# Altium PCB pcb.PcbDoc (part 3 of 6)
Units mm, origin at the board's own origin, x right, y up, seen from the top; angles counter-clockwise.
Board outline 85.44 x 182.72 mm, 2 copper layers (Top Layer, Bottom Layer); 68 components, 54 nets, 232 pads, 184 vias.
Unrouted connection lines stored in the file: 53.
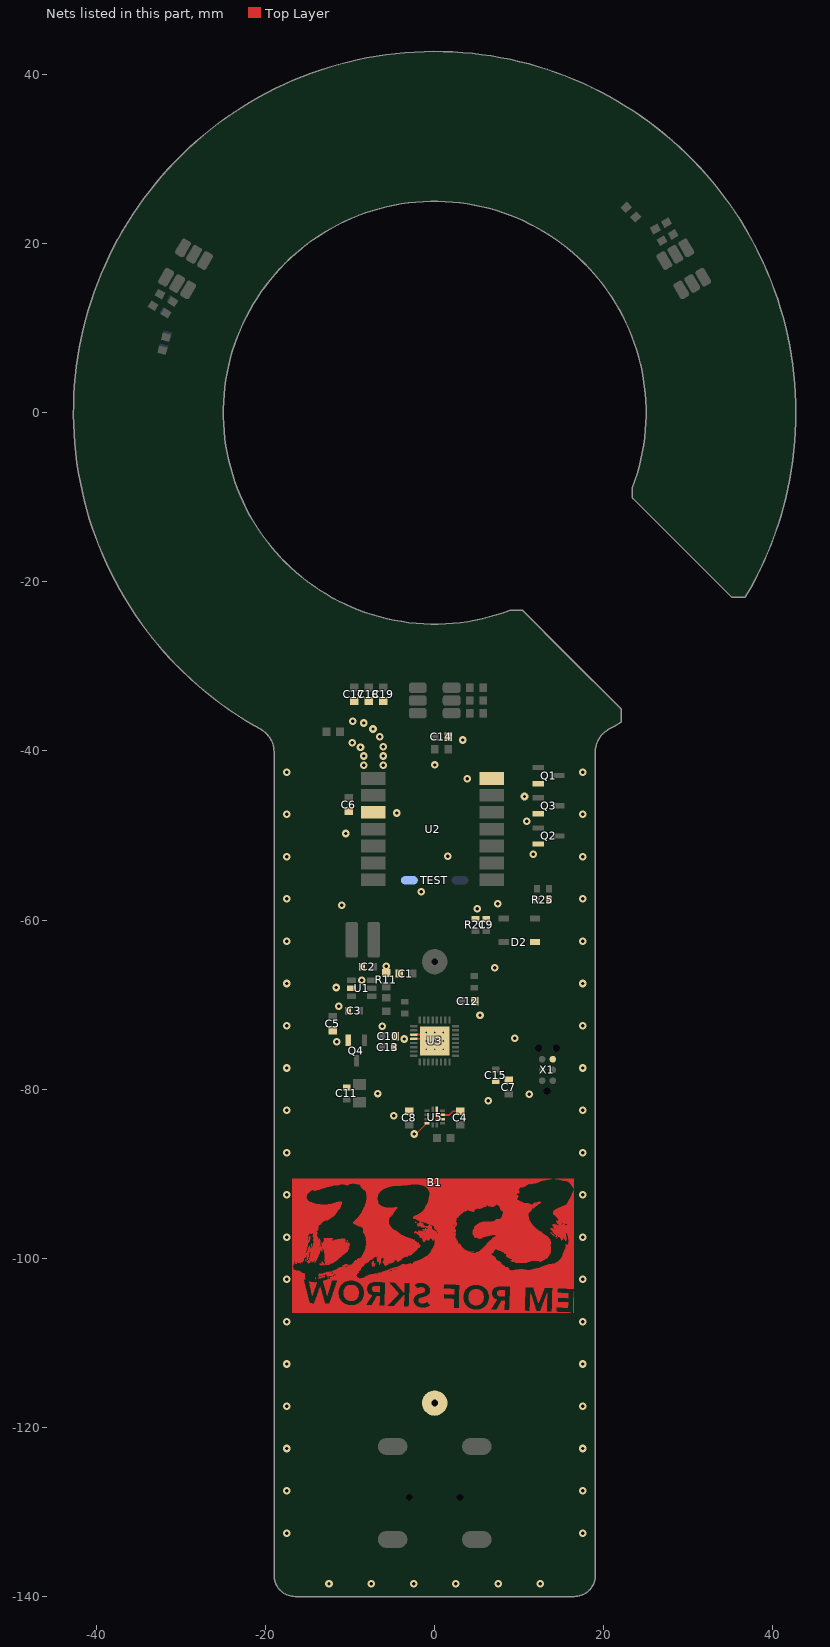
[diagram p3: the nets of this part, all layers, seen from the top]

## Via types
v1: diameter 0.9, hole 0.4, Top Layer to Bottom Layer, 143 vias
v2: diameter 1.27, hole 0.7, Top Layer to Bottom Layer, 32 vias
v3: diameter 0.5, hole 0.2, Top Layer to Bottom Layer, 9 vias

## Nets (pads, with @x,y where several pads share a name; then routed paths per layer and width w, separated by ;. In a path a pad name is that pad's centre, name@x,y a point inside that pad or via, vN(x,y) a via of type N, cw(c..) or ccw(c..) an arc to the next point about the centre after c; other vN are vias at no path point) (continued)
GND: (continued)
  Top Layer w0.025: -13.025,-99.406 -10.663,-99.406 ; -13.025,-99.381 -10.612,-99.381 ; -13.025,-97.781 -12.162,-97.781 ; -13.025,-97.755 -12.162,-97.755 ; -13.025,-97.73 -12.238,-97.73 ; -13.025,-97.704 -12.213,-97.704 ; -13.025,-97.603 -12.924,-97.603 ; -13,-103.369 -12.416,-103.369 ; -13,-103.343 -12.416,-103.343 ; -13,-103.318 -12.39,-103.318 ; -13,-103.292 -12.39,-103.292 ; -13,-101.692 -12.898,-101.692 ; -13,-100.295 -11.755,-100.295 ; -13,-100.27 -11.73,-100.27 ; -13,-100.244 -11.679,-100.244 ; -13,-100.219 -11.654,-100.219 ; -13,-100.194 -11.603,-100.194 ; -13,-100.168 -11.552,-100.168 ; -13,-100.143 -11.527,-100.143 ; -13,-100.117 -11.501,-100.117 ; -13,-100.092 -11.476,-100.092 ; -13,-100.067 -11.476,-100.067 ; -13,-100.041 -11.451,-100.041 ; -13,-100.016 -11.425,-100.016 ; -13,-99.99 -11.4,-99.99 ; -13,-99.965 -11.374,-99.965 ; -12.975,-103.445 -12.441,-103.445 ; -12.975,-103.419 -12.416,-103.419 ; -12.975,-103.394 -12.416,-103.394 ; -12.975,-102.607 -12.187,-102.607 ; -12.975,-100.371 -11.882,-100.371 ; -12.975,-100.346 -11.832,-100.346 ; -12.975,-100.321 -11.806,-100.321 ; -12.949,-103.546 -12.467,-103.546 ; -12.949,-103.521 -12.467,-103.521 ; -12.949,-103.496 -12.441,-103.496 ; -12.949,-103.47 -12.441,-103.47 ; -12.949,-100.625 -12.898,-100.625 ; -12.949,-100.6 -12.822,-100.6 ; -12.949,-100.575 -12.771,-100.575 ; -12.949,-100.448 -12.517,-100.448 ; -12.949,-100.422 -12.467,-100.422 ; -12.949,-100.397 -12.39,-100.397 ; -12.924,-103.623 -12.492,-103.623 ; -12.924,-103.597 -12.467,-103.597 ; -12.924,-103.572 -12.467,-103.572 ; -12.924,-100.549 -12.721,-100.549 ; -12.924,-100.473 -12.568,-100.473 ; -12.898,-103.724 -12.517,-103.724 ; -12.898,-103.699 -12.517,-103.699 ; -12.898,-103.673 -12.492,-103.673 ; -12.898,-103.648 -12.492,-103.648 ; -12.898,-100.524 -12.644,-100.524 ; -12.898,-100.498 -12.594,-100.498 ; -12.873,-103.8 -12.543,-103.8 ; -12.873,-103.775 -12.517,-103.775 ; -12.873,-103.75 -12.517,-103.75 ; -12.873,-100.727 -12.822,-100.727 ; -12.873,-100.702 -12.543,-100.702 ; -12.873,-93.64 -11.095,-93.64 ; -12.848,-103.902 -12.568,-103.902 ; -12.848,-103.877 -12.568,-103.877 ; -12.848,-103.851 -12.543,-103.851 ; -12.848,-103.826 -12.543,-103.826 ; -12.848,-102.581 -12.187,-102.581 ; -12.848,-101.87 -11.959,-101.87 ; -12.848,-101.692 -12.213,-101.692 ; -12.822,-103.978 -12.594,-103.978 ; -12.822,-103.953 -12.568,-103.953 ; -12.822,-103.927 -12.568,-103.927 ; -12.822,-101.845 -11.959,-101.845 ; -12.822,-100.676 -12.492,-100.676 ; -12.797,-104.08 -12.619,-104.08 ; -12.797,-104.054 -12.619,-104.054 ; -12.797,-104.029 -12.594,-104.029 ; -12.797,-104.004 -12.594,-104.004 ; -12.797,-101.667 -12.213,-101.667 ; -12.771,-104.156 -12.644,-104.156 ; -12.771,-104.131 -12.619,-104.131 ; -12.771,-104.105 -12.619,-104.105 ; -12.771,-102.556 -12.162,-102.556 ; -12.771,-101.895 -11.959,-101.895 ; -12.771,-101.641 -12.67,-101.641 ; -12.746,-104.258 -12.67,-104.258 ; -12.746,-104.232 -12.67,-104.232 ; -12.746,-104.207 -12.644,-104.207 ; -12.746,-104.181 -12.644,-104.181 ; -12.746,-101.921 -11.984,-101.921 ; -12.746,-101.819 -12.365,-101.819 ; -12.746,-101.794 -12.34,-101.794 ; -12.746,-101.768 -12.263,-101.768 ; -12.746,-101.616 -12.721,-101.616 ; -12.721,-104.334 -12.695,-104.334 ; -12.721,-104.308 -12.67,-104.308 ; -12.721,-104.283 -12.67,-104.283 ; -12.721,-102.53 16.464,-102.53 ; -12.721,-102.073 -12.695,-102.073 ; -12.721,-102.048 -12.67,-102.048 ; -12.721,-100.727 -12.594,-100.727 ; -12.67,-102.327 -12.594,-102.327 ; -12.67,-100.651 -12.441,-100.651 ; -12.644,-101.946 -12.009,-101.946 ; -12.644,-101.641 -12.213,-101.641 ; -12.619,-102.505 16.464,-102.505 ; -12.619,-102.302 -12.467,-102.302 ; -12.619,-102.048 -12.492,-102.048 ; -12.619,-102.022 -12.441,-102.022 ; -12.619,-101.997 -12.06,-101.997 ; -12.619,-101.972 -12.035,-101.972 ; -12.594,-93.615 -11.07,-93.615 ; -12.568,-100.625 -12.39,-100.625 ; -12.568,-97.628 -12.06,-97.628 ; -12.543,-102.48 16.464,-102.48 ; -12.543,-100.6 -12.365,-100.6 ; -12.517,-101.616 -8.987,-101.616 ; -12.492,-100.575 -12.365,-100.575 ; -12.467,-100.549 -12.162,-100.549 ; -12.441,-105.375 -10.663,-105.375 ; -12.441,-102.454 16.464,-102.454 ; -12.416,-105.35 -10.714,-105.35 ; -12.416,-105.324 -10.739,-105.324 ; -12.416,-105.299 -10.79,-105.299 ; -12.416,-101.591 -9.012,-101.591 ; -12.416,-100.524 -12.111,-100.524 ; -12.39,-105.274 -10.816,-105.274 ; -12.39,-105.248 -10.866,-105.248 ; -12.39,-105.223 -10.892,-105.223 ; -12.365,-105.197 -10.917,-105.197 ; -12.365,-105.172 -10.943,-105.172 ; -12.365,-105.147 -10.993,-105.147 ; -12.365,-102.429 16.464,-102.429 ; -12.365,-102.276 -12.187,-102.276 ; -12.365,-102.251 -12.187,-102.251 ; -12.365,-100.498 -12.086,-100.498 ; -12.365,-100.397 -11.933,-100.397 ; -12.34,-105.121 -11.019,-105.121 ; -12.34,-105.096 -11.044,-105.096 ; -12.34,-105.07 -11.044,-105.07 ; -12.34,-102.302 -12.238,-102.302 ; -12.34,-102.226 -12.162,-102.226 ; -12.34,-100.473 -12.035,-100.473 ; -12.34,-100.422 -11.959,-100.422 ; -12.34,-93.59 -11.07,-93.59 ; -12.314,-105.045 -11.07,-105.045 ; -12.314,-105.02 -11.095,-105.02 ; -12.314,-104.994 -11.12,-104.994 ; -12.314,-100.448 -12.009,-100.448 ; -12.289,-104.969 -11.146,-104.969 ; -12.289,-104.943 -11.146,-104.943 ; -12.289,-104.918 -11.171,-104.918 ; -12.289,-102.403 16.464,-102.403 ; -12.289,-102.2 -12.162,-102.2 ; -12.289,-102.022 -12.111,-102.022 ; -12.263,-104.893 -11.197,-104.893 ; -12.263,-104.867 -11.197,-104.867 ; -12.263,-104.842 -11.222,-104.842 ; -12.263,-100.575 -12.238,-100.575 ; -12.238,-104.816 -11.222,-104.816 ; -12.238,-104.791 -11.247,-104.791 ; -12.238,-102.378 -8.911,-102.378 ; -12.213,-104.766 -11.273,-104.766 ; -12.213,-104.74 -11.273,-104.74 ; -12.213,-104.715 -11.273,-104.715 ; -12.213,-102.175 -11.984,-102.175 ; -12.213,-101.565 -9.012,-101.565 ; -12.187,-104.689 -11.298,-104.689 ; -12.187,-104.664 -11.298,-104.664 ; -12.187,-104.639 -11.324,-104.639 ; -12.187,-93.564 -11.044,-93.564 ; -12.162,-104.613 -11.324,-104.613 ; -12.162,-104.588 -11.324,-104.588 ; -12.162,-104.562 -11.349,-104.562 ; -12.162,-102.353 -8.987,-102.353 ; -12.136,-104.537 -11.349,-104.537 ; -12.136,-104.512 -11.349,-104.512 ; -12.136,-104.486 -11.374,-104.486 ; -12.136,-102.2 -11.959,-102.2 ; -12.136,-102.149 -11.984,-102.149 ; -12.136,-101.54 -9.038,-101.54 ; -12.111,-104.461 -11.374,-104.461 ; -12.111,-104.435 -11.374,-104.435 ; -12.111,-104.41 -11.374,-104.41 ; -12.111,-102.327 -9.012,-102.327 ; -12.111,-102.226 -11.933,-102.226 ; -12.111,-102.124 -12.009,-102.124 ; -12.111,-101.514 -9.038,-101.514 ; -12.086,-104.385 -11.374,-104.385 ; -12.086,-104.359 -11.4,-104.359 ; -12.086,-104.334 -11.4,-104.334 ; -12.086,-93.539 -11.019,-93.539 ; -12.06,-104.308 -11.4,-104.308 ; -12.06,-104.283 -11.4,-104.283 ; -12.06,-104.258 -11.4,-104.258 ; -12.06,-102.251 -9.139,-102.251 ; -12.06,-102.099 -12.035,-102.099 ; -12.06,-101.819 -11.984,-101.819 ; -12.035,-104.232 -11.4,-104.232 ; -12.035,-104.207 -11.4,-104.207 ; -12.035,-104.181 -11.4,-104.181 ; -12.035,-102.556 16.464,-102.556 ; -12.035,-102.302 -9.063,-102.302 ; -12.035,-102.276 -9.114,-102.276 ; -12.035,-101.794 -11.984,-101.794 ; -12.035,-101.768 -12.009,-101.768 ; -12.035,-101.489 -9.038,-101.489 ; -12.035,-97.908 -10.562,-97.908 ; -12.009,-104.156 -11.4,-104.156 ; -12.009,-104.131 -11.4,-104.131 ; -12.009,-104.105 -11.4,-104.105 ; -12.009,-101.641 -8.987,-101.641 ; -12.009,-93.513 -11.019,-93.513 ; -11.984,-104.08 -11.4,-104.08 ; -11.984,-104.054 -11.4,-104.054 ; -11.984,-104.029 -11.4,-104.029 ; -11.984,-101.667 -9.063,-101.667 ; -11.959,-104.004 -11.4,-104.004 ; -11.959,-103.978 -11.4,-103.978 ; -11.959,-103.953 -11.4,-103.953 ; -11.959,-101.743 -9.139,-101.743 ; -11.959,-101.718 -9.139,-101.718 ; -11.959,-101.692 -9.114,-101.692 ; -11.959,-97.882 -10.562,-97.882 ; -11.933,-103.927 -11.4,-103.927 ; -11.933,-103.902 -11.4,-103.902 ; -11.933,-103.877 -11.4,-103.877 ; -11.933,-101.845 -11.857,-101.845 ; -11.933,-101.819 -11.832,-101.819 ; -11.933,-101.794 -9.165,-101.794 ; -11.933,-101.768 -9.165,-101.768 ; -11.933,-101.464 -9.063,-101.464 ; -11.933,-93.488 -10.993,-93.488 ; -11.908,-103.851 -11.4,-103.851 ; -11.908,-103.826 -11.4,-103.826 ; -11.908,-103.8 -11.4,-103.8 ; -11.882,-103.775 -11.4,-103.775 ; -11.882,-103.75 -11.374,-103.75 ; -11.882,-103.724 -11.374,-103.724 ; -11.882,-102.226 -9.165,-102.226 ; -11.882,-102.2 -9.19,-102.2 ; -11.882,-102.175 -9.215,-102.175 ; -11.882,-102.149 -9.241,-102.149 ; -11.882,-102.124 -9.241,-102.124 ; -11.882,-102.099 -9.266,-102.099 ; -11.882,-97.857 -10.562,-97.857 ; -11.857,-103.699 -11.374,-103.699 ; -11.857,-103.673 -11.374,-103.673 ; -11.857,-103.648 -11.374,-103.648 ; -11.857,-102.073 -9.266,-102.073 ; -11.857,-101.438 -9.063,-101.438 ; -11.857,-93.463 -10.993,-93.463 ; -11.832,-103.623 -11.349,-103.623 ; -11.832,-103.597 -11.349,-103.597 ; -11.832,-103.572 -11.349,-103.572 ; -11.832,-102.048 -9.266,-102.048 ; -11.806,-103.546 -11.324,-103.546 ; -11.806,-103.521 -11.324,-103.521 ; -11.806,-103.496 -11.324,-103.496 ; -11.806,-102.022 -9.266,-102.022 ; -11.806,-101.413 -9.063,-101.413 ; -11.806,-97.831 -10.562,-97.831 ; -11.806,-93.437 -10.968,-93.437 ; -11.781,-103.47 -11.298,-103.47 ; -11.781,-103.445 -11.298,-103.445 ; -11.781,-103.419 -11.298,-103.419 ; -11.755,-103.394 -11.273,-103.394 ; -11.755,-103.369 -11.273,-103.369 ; -11.755,-103.343 -11.247,-103.343 ; -11.755,-101.997 -9.292,-101.997 ; -11.755,-101.387 -8.834,-101.387 ; -11.73,-103.318 -11.247,-103.318 ; -11.73,-103.292 -11.222,-103.292 ; -11.73,-103.267 -11.222,-103.267 ; -11.73,-101.972 -9.292,-101.972 ; -11.73,-101.946 -9.292,-101.946 ; -11.73,-97.806 -10.562,-97.806 ; -11.73,-93.412 -10.968,-93.412 ; -11.705,-103.242 -11.197,-103.242 ; -11.705,-103.216 -11.171,-103.216 ; -11.705,-103.191 -11.171,-103.191 ; -11.705,-101.921 -9.266,-101.921 ; -11.705,-101.362 -8.834,-101.362 ; -11.679,-103.165 -11.146,-103.165 ; -11.679,-103.14 -11.12,-103.14 ; -11.679,-103.115 -11.12,-103.115 ; -11.679,-101.895 -9.266,-101.895 ; -11.679,-101.87 -9.241,-101.87 ; -11.679,-101.845 -9.215,-101.845 ; -11.679,-101.819 -9.19,-101.819 ; -11.654,-103.089 -11.095,-103.089 ; -11.654,-103.064 -11.07,-103.064 ; -11.654,-103.038 -11.044,-103.038 ; -11.654,-101.337 -8.809,-101.337 ; -11.654,-93.386 -10.968,-93.386 ; -11.628,-103.013 -11.019,-103.013 ; -11.628,-102.988 -10.993,-102.988 ; -11.628,-102.962 -10.968,-102.962 ; -11.628,-97.781 -10.562,-97.781 ; -11.603,-102.937 -10.943,-102.937 ; -11.603,-102.911 -10.917,-102.911 ; -11.603,-102.886 -10.892,-102.886 ; -11.603,-101.311 -8.784,-101.311 ; -11.578,-102.861 -10.866,-102.861 ; -11.578,-102.835 -10.816,-102.835 ; -11.578,-102.81 -10.79,-102.81 ; -11.578,-101.286 -8.758,-101.286 ; -11.552,-102.784 -10.739,-102.784 ; -11.552,-102.759 -10.714,-102.759 ; -11.552,-102.734 -10.663,-102.734 ; -11.552,-101.26 -8.758,-101.26 ; -11.552,-93.361 -10.993,-93.361 ; -11.527,-102.708 -10.612,-102.708 ; -11.527,-102.683 -10.536,-102.683 ; -11.527,-102.657 -10.485,-102.657 ; -11.527,-97.755 -10.587,-97.755 ; -11.501,-102.632 -10.409,-102.632 ; -11.501,-102.607 -10.308,-102.607 ; -11.501,-102.581 -10.181,-102.581 ; -11.501,-101.235 -8.758,-101.235 ; -11.451,-101.21 -8.758,-101.21 ; -11.425,-101.184 -10.46,-101.184 ; -11.425,-93.336 -11.019,-93.336 ; -11.374,-101.159 -10.46,-101.159 ; -11.374,-97.73 -10.612,-97.73 ; -11.324,-101.133 -10.46,-101.133 ; -11.298,-93.31 -11.044,-93.31 ; -11.273,-101.108 -10.46,-101.108 ; -11.222,-101.083 -10.485,-101.083 ; -11.197,-101.057 -10.511,-101.057 ; -11.146,-101.032 -10.612,-101.032 ; -11.12,-97.704 -10.663,-97.704 ; -10.917,-101.006 -10.79,-101.006 ; -10.917,-100.981 -10.816,-100.981 ; -10.917,-100.956 -10.816,-100.956 ; -10.917,-100.93 -10.816,-100.93 ; -10.892,-100.905 -10.816,-100.905 ; -10.892,-100.879 -10.79,-100.879 ; -10.892,-100.854 -10.536,-100.854 ; -10.866,-100.829 -10.714,-100.829 ; -10.841,-100.803 -10.765,-100.803 ; -10.816,-98.441 -10.079,-98.441 ; -10.79,-98.416 -10.079,-98.416 ; -10.79,-91.202 -10.13,-91.202 ; -10.765,-104.181 -8.987,-104.181 ; -10.765,-104.156 -8.987,-104.156 ; -10.765,-104.131 -8.987,-104.131 ; -10.765,-104.105 -8.987,-104.105 ; -10.765,-104.08 -8.987,-104.08 ; -10.765,-104.054 -8.987,-104.054 ; -10.765,-104.029 -8.987,-104.029 ; -10.765,-104.004 -8.987,-104.004 ; -10.765,-103.978 -8.987,-103.978 ; -10.765,-103.953 -8.987,-103.953 ; -10.765,-100.879 -10.562,-100.879 ; -10.765,-98.39 -10.054,-98.39 ; -10.739,-104.334 -9.012,-104.334 ; -10.739,-104.308 -9.012,-104.308 ; -10.739,-104.283 -9.012,-104.283 ; -10.739,-104.258 -9.012,-104.258 ; -10.739,-104.232 -9.012,-104.232 ; -10.739,-104.207 -8.987,-104.207 ; -10.739,-103.927 -8.987,-103.927 ; -10.739,-103.902 -8.987,-103.902 ; -10.739,-103.877 -8.987,-103.877 ; -10.739,-103.851 -9.012,-103.851 ; -10.739,-103.826 -9.012,-103.826 ; -10.739,-103.8 -9.012,-103.8 ; -10.739,-100.905 -10.612,-100.905 ; -10.739,-98.365 -10.054,-98.365 ; -10.714,-104.41 -9.038,-104.41 ; -10.714,-104.385 -9.038,-104.385 ; -10.714,-104.359 -9.038,-104.359 ; -10.714,-103.775 -9.012,-103.775 ; -10.714,-103.75 -9.038,-103.75 ; -10.714,-103.724 -9.038,-103.724 ; -10.714,-100.956 -10.663,-100.956 ; -10.714,-100.93 -10.638,-100.93 ; -10.714,-98.339 -10.384,-98.339 ; -10.689,-104.461 -9.063,-104.461 ; -10.689,-104.435 -9.063,-104.435 ; -10.689,-103.699 -9.038,-103.699 ; -10.689,-103.673 -9.063,-103.673 ; -10.689,-103.648 -9.063,-103.648 ; -10.689,-98.314 -10.384,-98.314 ; -10.689,-98.289 -10.384,-98.289 ; -10.663,-104.512 -9.088,-104.512 ; -10.663,-104.486 -9.063,-104.486 ; -10.663,-103.623 -9.063,-103.623 ; -10.663,-103.597 -9.088,-103.597 ; -10.663,-98.263 -10.384,-98.263 ; -10.638,-104.562 -9.114,-104.562 ; -10.638,-104.537 -9.088,-104.537 ; -10.638,-103.572 -9.088,-103.572 ; -10.638,-100.829 -10.511,-100.829 ; -10.638,-100.803 -10.485,-100.803 ; -10.638,-100.778 -10.435,-100.778 ; -10.638,-100.752 -10.409,-100.752 ; -10.638,-98.238 -10.384,-98.238 ; -10.638,-98.212 -10.384,-98.212 ; -10.612,-104.613 -9.139,-104.613 ; -10.612,-104.588 -9.139,-104.588 ; -10.612,-103.546 -9.114,-103.546 ; -10.612,-103.521 -9.139,-103.521 ; -10.612,-100.727 -10.409,-100.727 ; -10.612,-98.187 -10.511,-98.187 ; -10.612,-91.227 -10.155,-91.227 ; -10.587,-104.639 -9.165,-104.639 ; -10.587,-103.496 -9.139,-103.496 ; -10.587,-100.702 -10.511,-100.702 ; -10.587,-98.162 -10.536,-98.162 ; -10.562,-104.664 -9.19,-104.664 ; -10.562,-103.47 -9.165,-103.47 ; -10.562,-103.445 -9.19,-103.445 ; -10.562,-98.136 -10.536,-98.136 ; -10.536,-104.689 -9.215,-104.689 ; -10.536,-103.419 -9.215,-103.419 ; -10.536,-100.676 -10.511,-100.676 ; -10.511,-104.715 -9.215,-104.715 ; -10.511,-103.394 -9.241,-103.394 ; -10.511,-91.253 -10.206,-91.253 ; -10.485,-104.74 -9.241,-104.74 ; -10.485,-103.369 -9.266,-103.369 ; -10.46,-104.766 -9.266,-104.766 ; -10.46,-103.343 -9.292,-103.343 ; -10.46,-98.187 -10.384,-98.187 ; -10.46,-98.162 -10.384,-98.162 ; -10.435,-104.791 -9.317,-104.791 ; -10.435,-103.318 -9.317,-103.318 ; -10.435,-100.905 -10.282,-100.905 ; -10.435,-100.879 -10.257,-100.879 ; -10.435,-98.136 -10.384,-98.136 ; -10.435,-98.111 -10.358,-98.111 ; -10.435,-98.085 -10.358,-98.085 ; -10.435,-91.278 -10.257,-91.278 ; -10.409,-104.816 -9.342,-104.816 ; -10.409,-101.184 -8.758,-101.184 ; -10.409,-101.159 -8.758,-101.159 ; -10.409,-100.854 -10.231,-100.854 ; -10.409,-98.06 -10.358,-98.06 ; -10.409,-98.035 -10.358,-98.035 ; -10.409,-98.009 -10.358,-98.009 ; -10.384,-103.292 -9.342,-103.292 ; -10.384,-101.133 -8.758,-101.133 ; -10.384,-101.032 -10.358,-101.032 ; -10.384,-100.829 -10.206,-100.829 ; -10.384,-97.984 -10.358,-97.984 ; -10.384,-97.958 -10.358,-97.958 ; -10.384,-97.933 -10.333,-97.933 ; -10.384,-97.908 -10.333,-97.908 ; -10.358,-104.842 -9.368,-104.842 ; -10.358,-103.267 -9.393,-103.267 ; -10.358,-100.803 -10.206,-100.803 ; -10.358,-98.339 -10.155,-98.339 ; -10.358,-98.314 -10.181,-98.314 ; -10.358,-97.882 -10.308,-97.882 ; -10.358,-97.857 -10.308,-97.857 ; -10.333,-104.867 -9.419,-104.867 ; -10.333,-101.108 -8.758,-101.108 ; -10.333,-100.778 -10.231,-100.778 ; -10.333,-98.289 -10.181,-98.289 ; -10.308,-103.242 -9.444,-103.242 ; -10.308,-98.797 -10.155,-98.797 ; -10.308,-98.263 -10.155,-98.263 ; -10.308,-98.238 -10.155,-98.238 ; -10.282,-104.893 -9.469,-104.893 ; -10.282,-98.212 -10.13,-98.212 ; -10.257,-103.216 -9.495,-103.216 ; -10.257,-101.006 -8.631,-101.006 ; -10.257,-100.981 -8.606,-100.981 ; -10.257,-98.771 -10.13,-98.771 ; -10.257,-98.187 -10.13,-98.187 ; -10.206,-104.918 -9.52,-104.918 ; -10.206,-101.032 -10.181,-101.032 ; -10.206,-98.746 -10.155,-98.746 ; -10.206,-98.162 -10.13,-98.162 ; -10.181,-103.191 -9.546,-103.191 ; -10.181,-101.083 -8.758,-101.083 ; -10.181,-100.956 -8.58,-100.956 ; -10.155,-100.93 -8.555,-100.93 ; -10.155,-100.905 -8.504,-100.905 ; -10.13,-104.943 -9.596,-104.943 ; -10.13,-101.057 -8.733,-101.057 ; -10.104,-103.165 -9.647,-103.165 ; -10.104,-101.032 -8.682,-101.032 ; -10.104,-98.339 -10.054,-98.339 ; -10.028,-100.879 -8.479,-100.879 ; -10.028,-100.854 -8.453,-100.854 ; -10.028,-100.829 -8.428,-100.829 ; -10.028,-100.803 -8.403,-100.803 ; -10.028,-100.778 -9.977,-100.778 ; -10.003,-104.969 -9.723,-104.969 ; -9.876,-100.778 -8.403,-100.778 ; -9.825,-100.752 -8.377,-100.752 ; -9.8,-100.727 -8.352,-100.727 ; -9.774,-100.702 -8.326,-100.702 ; -9.749,-100.676 -8.326,-100.676 ; -9.749,-100.651 -8.301,-100.651 ; -9.723,-100.625 -8.276,-100.625 ; -9.698,-105.553 -8.022,-105.553 ; -9.647,-95.774 -5.431,-95.774 ; -9.622,-100.6 -8.25,-100.6 ; -9.622,-95.799 -5.431,-95.799 ; -9.622,-95.749 -5.431,-95.749 ; -9.596,-102.581 16.464,-102.581 ; -9.596,-100.575 -8.25,-100.575 ; -9.596,-100.549 -8.225,-100.549 ; -9.596,-95.825 -5.431,-95.825 ; -9.596,-95.723 -5.431,-95.723 ; -9.571,-100.524 -8.174,-100.524 ; -9.571,-100.498 -8.098,-100.498 ; -9.571,-100.473 -8.047,-100.473 ; -9.571,-95.85 -5.431,-95.85 ; -9.571,-95.698 -5.456,-95.698 ; -9.546,-100.448 -7.996,-100.448 ; -9.546,-100.422 -7.92,-100.422 ; -9.546,-95.672 -5.456,-95.672 ; -9.52,-105.528 -8.199,-105.528 ; -9.52,-100.397 -7.869,-100.397 ; -9.52,-100.371 -7.844,-100.371 ; -9.52,-95.876 -5.405,-95.876 ; -9.52,-95.647 -5.456,-95.647 ; -9.52,-91.1 11.155,-91.1 ; -9.495,-100.346 -7.818,-100.346 ; -9.495,-100.321 -7.793,-100.321 ; -9.495,-95.622 -5.456,-95.622 ; -9.469,-102.607 16.464,-102.607 ; -9.469,-95.901 -5.405,-95.901 ; -9.469,-95.596 -5.456,-95.596 ; -9.444,-95.571 -5.456,-95.571 ; -9.419,-95.926 -5.405,-95.926 ; -9.419,-95.545 -5.431,-95.545 ; -9.393,-105.502 -8.174,-105.502 ; -9.393,-100.295 -7.768,-100.295 ; -9.393,-95.52 -5.431,-95.52 ; -9.393,-91.126 11.13,-91.126 ; -9.368,-102.632 16.464,-102.632 ; -9.368,-100.27 -7.768,-100.27 ; -9.368,-100.244 -9.266,-100.244 ; -9.368,-95.495 -5.431,-95.495 ; -9.342,-100.219 -9.317,-100.219 ; -9.342,-95.952 -5.38,-95.952 ; -9.342,-95.469 -5.431,-95.469 ; -9.317,-105.477 -8.174,-105.477 ; -9.317,-95.444 -5.431,-95.444 ; -9.317,-91.151 11.079,-91.151 ; -9.292,-102.657 16.464,-102.657 ; -9.292,-95.418 -5.431,-95.418 ; -9.266,-95.977 -5.38,-95.977 ; -9.266,-95.393 -5.405,-95.393 ; -9.241,-105.451 -8.149,-105.451 ; -9.241,-96.003 -5.355,-96.003 ; -9.241,-95.368 -5.405,-95.368 ; -9.241,-91.177 11.054,-91.177 ; -9.215,-102.683 16.464,-102.683 ; -9.215,-100.244 -7.742,-100.244 ; -9.215,-95.342 -5.405,-95.342 ; -9.19,-100.219 -7.717,-100.219 ; -9.19,-96.028 -5.355,-96.028 ; -9.19,-95.317 -5.405,-95.317 ; -9.165,-105.426 -8.123,-105.426 ; -9.165,-102.708 16.464,-102.708 ; -9.165,-100.194 -7.691,-100.194 ; -9.165,-100.168 -7.666,-100.168 ; -9.165,-100.143 -7.615,-100.143 ; -9.165,-95.291 -5.405,-95.291 ; -9.139,-100.117 -7.564,-100.117 ; -9.139,-96.053 -5.355,-96.053 ; -9.139,-95.266 -5.38,-95.266 ; -9.114,-105.401 -8.123,-105.401 ; -9.114,-102.734 -7.056,-102.734 ; -9.114,-100.092 -7.514,-100.092 ; -9.114,-95.241 -5.38,-95.241 ; -9.088,-100.067 -7.463,-100.067 ; -9.088,-96.079 -5.329,-96.079 ; -9.088,-95.215 -5.38,-95.215 ; -9.063,-105.375 -8.098,-105.375 ; -9.063,-102.759 -7.336,-102.759 ; -9.063,-95.19 -5.38,-95.19 ; -9.038,-105.35 -8.098,-105.35 ; -9.038,-100.041 -8.885,-100.041 ; -9.038,-95.164 -5.355,-95.164 ; -9.038,-95.139 -5.355,-95.139 ; -9.012,-102.784 -7.437,-102.784 ; -9.012,-100.016 -8.911,-100.016 ; -9.012,-96.104 -5.304,-96.104 ; -9.012,-95.114 -5.355,-95.114 ; -8.987,-105.324 -8.072,-105.324 ; -8.987,-101.413 -8.834,-101.413 ; -8.987,-95.088 -5.355,-95.088 ; -8.987,-91.202 -2.586,-91.202 ; -8.961,-102.81 -7.514,-102.81 ; -8.961,-96.13 -5.304,-96.13 ; -8.961,-95.063 -5.329,-95.063 ; -8.936,-105.299 -8.047,-105.299 ; -8.936,-102.835 -7.59,-102.835 ; -8.936,-101.438 -8.86,-101.438 ; -8.936,-95.037 -5.329,-95.037 ; -8.936,-95.012 -5.304,-95.012 ; -8.911,-105.274 -8.047,-105.274 ; -8.911,-102.861 -7.641,-102.861 ; -8.911,-94.987 -5.304,-94.987 ; -8.885,-105.248 -8.022,-105.248 ; -8.885,-96.155 -5.278,-96.155 ; -8.885,-94.961 -5.278,-94.961 ; -8.885,-91.227 -2.815,-91.227 ; -8.86,-102.886 -7.691,-102.886 ; -8.86,-94.936 -5.278,-94.936 ; -8.86,-94.91 -5.253,-94.91 ; -8.834,-105.223 -7.996,-105.223 ; -8.834,-102.911 -7.717,-102.911 ; -8.834,-100.041 -7.412,-100.041 ; -8.834,-94.885 -5.253,-94.885 ; -8.834,-91.253 -3.018,-91.253 ; -8.809,-105.197 -7.996,-105.197 ; -8.809,-102.937 -7.742,-102.937 ; -8.809,-96.18 -5.278,-96.18 ; -8.809,-94.86 -5.024,-94.86 ; -8.784,-105.172 -7.971,-105.172 ; -8.784,-102.962 -7.793,-102.962 ; -8.784,-100.016 -7.387,-100.016 ; -8.784,-99.99 -7.336,-99.99 ; -8.784,-94.834 -4.999,-94.834 ; -8.784,-94.809 -4.999,-94.809 ; -8.784,-91.278 -3.246,-91.278 ; -8.758,-105.147 -7.945,-105.147 ; -8.758,-102.988 -7.818,-102.988 ; -8.758,-102.378 16.464,-102.378 ; -8.758,-99.965 -7.31,-99.965 ; -8.758,-96.206 -5.253,-96.206 ; -8.758,-94.783 -4.974,-94.783 ; -8.758,-91.304 -3.475,-91.304 ; -8.733,-105.121 -7.945,-105.121 ; -8.733,-103.013 -7.844,-103.013 ; -8.733,-99.94 -7.285,-99.94 ; -8.733,-94.758 -4.974,-94.758 ; -8.733,-94.733 -4.948,-94.733 ; -8.733,-91.481 -5.304,-91.481 ; -8.733,-91.456 -5.228,-91.456 ; -8.733,-91.431 -5.151,-91.431 ; -8.733,-91.405 -4.999,-91.405 ; -8.733,-91.38 -4.364,-91.38 ; -8.733,-91.354 -4.008,-91.354 ; -8.733,-91.329 -3.729,-91.329 ; -8.707,-105.096 -7.92,-105.096 ; -8.707,-103.038 -7.844,-103.038 ; -8.707,-99.914 -7.285,-99.914 ; -8.707,-94.707 -4.948,-94.707 ; -8.707,-94.682 -4.923,-94.682 ; -8.707,-91.532 -5.482,-91.532 ; -8.707,-91.507 -5.38,-91.507 ; -8.682,-105.07 -7.895,-105.07 ; -8.682,-103.064 -7.869,-103.064 ; -8.682,-99.889 -7.26,-99.889 ; -8.682,-99.863 -7.234,-99.863 ; -8.682,-96.231 -5.228,-96.231 ; -8.682,-94.656 -4.923,-94.656 ; -8.682,-91.558 -5.558,-91.558 ; -8.657,-105.045 -7.895,-105.045 ; -8.657,-105.02 -7.869,-105.02 ; -8.657,-103.089 -7.895,-103.089 ; -8.657,-99.838 -7.183,-99.838 ; -8.657,-94.631 -4.897,-94.631 ; -8.657,-94.606 -4.897,-94.606 ; -8.657,-91.583 -5.634,-91.583 ; -8.631,-104.994 -7.844,-104.994 ; -8.631,-103.115 -7.92,-103.115 ; -8.631,-99.813 -7.133,-99.813 ; -8.631,-99.787 -7.006,-99.787 ; -8.631,-96.257 -5.228,-96.257 ; -8.631,-94.58 -4.872,-94.58 ; -8.631,-94.555 -4.872,-94.555 ; -8.631,-91.608 -5.71,-91.608 ; -8.606,-104.969 -7.844,-104.969 ; -8.606,-103.165 -7.945,-103.165 ; -8.606,-103.14 -7.92,-103.14 ; -8.606,-99.762 -6.879,-99.762 ; -8.606,-99.736 -6.777,-99.736 ; -8.606,-96.282 -5.202,-96.282 ; -8.606,-94.529 -4.847,-94.529 ; -8.606,-94.504 -4.847,-94.504 ; -8.606,-91.634 -5.786,-91.634 ; -8.58,-104.943 -7.818,-104.943 ; -8.58,-104.918 -7.793,-104.918 ; -8.58,-103.191 -7.945,-103.191 ; -8.58,-102.353 16.464,-102.353 ; -8.58,-99.711 -6.244,-99.711 ; -8.58,-99.686 -6.244,-99.686 ; -8.58,-96.307 -5.177,-96.307 ; -8.58,-94.479 -4.821,-94.479 ; -8.58,-94.453 -4.821,-94.453 ; -8.58,-91.659 -5.837,-91.659 ; -8.555,-104.893 -7.793,-104.893 ; -8.555,-103.242 -7.971,-103.242 ; -8.555,-103.216 -7.971,-103.216 ; -8.555,-99.66 -6.244,-99.66 ; -8.555,-96.333 -5.151,-96.333 ; -8.555,-94.428 -4.796,-94.428 ; -8.555,-94.402 -4.77,-94.402 ; -8.555,-91.685 -5.888,-91.685 ; -8.53,-104.867 -7.768,-104.867 ; -8.53,-104.842 -7.742,-104.842 ; -8.53,-103.292 -7.996,-103.292 ; -8.53,-103.267 -7.996,-103.267 ; -8.53,-99.635 -6.218,-99.635 ; -8.53,-99.609 -3.069,-99.609 ; -8.53,-96.358 -5.151,-96.358 ; -8.53,-94.377 -4.77,-94.377 ; -8.53,-94.352 -4.745,-94.352 ; -8.53,-91.71 -5.964,-91.71 ; -8.504,-104.816 -7.742,-104.816 ; -8.504,-104.791 -7.717,-104.791 ; -8.504,-103.318 -7.996,-103.318 ; -8.504,-99.584 -3.018,-99.584 ; -8.504,-99.559 -2.967,-99.559 ; -8.504,-96.409 -5.101,-96.409 ; -8.504,-96.384 -5.126,-96.384 ; -8.504,-94.326 -4.72,-94.326 ; -8.504,-94.301 -4.694,-94.301 ; -8.479,-104.766 -7.717,-104.766 ; -8.479,-104.74 -7.691,-104.74 ; -8.479,-103.394 -8.022,-103.394 ; -8.479,-103.369 -8.022,-103.369 ; -8.479,-103.343 -7.996,-103.343 ; -8.479,-102.327 16.464,-102.327 ; -8.479,-99.533 -2.789,-99.533 ; -8.479,-99.508 -2.738,-99.508 ; -8.479,-96.79 -4.516,-96.79 ; -8.479,-96.765 -4.542,-96.765 ; -8.479,-96.739 -4.567,-96.739 ; -8.479,-96.714 -4.593,-96.714 ; -8.479,-96.688 -4.643,-96.688 ; -8.479,-96.663 -4.821,-96.663 ; -8.479,-96.638 -4.872,-96.638 ; -8.479,-96.612 -4.897,-96.612 ; -8.479,-96.587 -4.923,-96.587 ; -8.479,-96.561 -4.948,-96.561 ; -8.479,-96.536 -4.974,-96.536 ; -8.479,-96.511 -4.999,-96.511 ; -8.479,-96.485 -5.024,-96.485 ; -8.479,-96.46 -5.05,-96.46 ; -8.479,-96.434 -5.075,-96.434 ; -8.479,-94.275 -4.694,-94.275 ; -8.479,-94.25 -4.669,-94.25 ; -8.479,-91.735 -6.015,-91.735 ; -8.453,-104.715 -7.666,-104.715 ; -8.453,-104.689 -7.666,-104.689 ; -8.453,-104.664 -7.641,-104.664 ; -8.453,-103.445 -8.022,-103.445 ; -8.453,-103.419 -8.022,-103.419 ; -8.453,-99.482 -2.713,-99.482 ; -8.453,-99.457 -2.688,-99.457 ; -8.453,-96.841 -4.44,-96.841 ; -8.453,-96.815 -4.466,-96.815 ; -8.453,-94.225 -4.643,-94.225 ; -8.453,-94.199 -4.618,-94.199 ; -8.453,-91.786 -6.117,-91.786 ; -8.453,-91.761 -6.066,-91.761 ; -8.428,-104.639 -7.615,-104.639 ; -8.428,-104.613 -7.615,-104.613 ; -8.428,-103.496 -8.022,-103.496 ; -8.428,-103.47 -8.022,-103.47 ; -8.428,-99.432 -2.637,-99.432 ; -8.428,-99.406 -2.611,-99.406 ; -8.428,-96.892 -4.389,-96.892 ; -8.428,-96.866 -4.415,-96.866 ; -8.428,-94.174 -4.593,-94.174 ; -8.428,-94.148 -4.567,-94.148 ; -8.428,-91.812 -6.167,-91.812 ; -8.403,-104.588 -7.59,-104.588 ; -8.403,-104.562 -7.564,-104.562 ; -8.403,-104.537 -7.564,-104.537 ; -8.403,-104.512 -7.539,-104.512 ; -8.403,-103.597 -8.047,-103.597 ; -8.403,-103.572 -8.047,-103.572 ; -8.403,-103.546 -8.022,-103.546 ; -8.403,-103.521 -8.022,-103.521 ; -8.403,-102.302 16.464,-102.302 ; -8.403,-99.381 -2.586,-99.381 ; -8.403,-99.355 -2.561,-99.355 ; -8.403,-96.942 -4.313,-96.942 ; -8.403,-96.917 -4.339,-96.917 ; -8.403,-94.123 -4.542,-94.123 ; -8.403,-94.098 -4.516,-94.098 ; -8.377,-104.486 -7.514,-104.486 ; -8.377,-104.461 -7.514,-104.461 ; -8.377,-104.435 -7.488,-104.435 ; -8.377,-104.41 -7.463,-104.41 ; -8.377,-103.699 -8.022,-103.699 ; -8.377,-103.673 -8.022,-103.673 ; -8.377,-103.648 -8.022,-103.648 ; -8.377,-103.623 -8.047,-103.623 ; -8.377,-99.33 -2.561,-99.33 ; -8.377,-99.305 -2.535,-99.305 ; -8.377,-96.968 -4.288,-96.968 ; -8.377,-94.072 -4.491,-94.072 ; -8.377,-94.047 -4.466,-94.047 ; -8.377,-91.837 -6.193,-91.837 ; -8.352,-104.385 -7.463,-104.385 ; -8.352,-104.359 -7.463,-104.359 ; -8.352,-104.334 -7.564,-104.334 ; -8.352,-104.308 -7.615,-104.308 ; -8.352,-104.283 -7.666,-104.283 ; -8.352,-104.258 -7.717,-104.258 ; -8.352,-104.232 -7.742,-104.232 ; -8.352,-104.207 -7.793,-104.207 ; -8.352,-103.851 -7.996,-103.851 ; -8.352,-103.826 -8.022,-103.826 ; -8.352,-103.8 -8.022,-103.8 ; -8.352,-103.775 -8.022,-103.775 ; -8.352,-103.75 -8.022,-103.75 ; -8.352,-103.724 -8.022,-103.724 ; -8.352,-102.276 16.464,-102.276 ; -8.352,-99.279 -2.51,-99.279 ; -8.352,-96.993 -4.262,-96.993 ; -8.352,-94.021 -4.466,-94.021 ; -8.352,-93.996 -5.685,-93.996 ; -8.326,-104.181 -7.818,-104.181 ; -8.326,-104.156 -7.844,-104.156 ; -8.326,-104.131 -7.869,-104.131 ; -8.326,-104.105 -7.869,-104.105 ; -8.326,-104.08 -7.895,-104.08 ; -8.326,-104.054 -7.92,-104.054 ; -8.326,-104.029 -7.92,-104.029 ; -8.326,-104.004 -7.945,-104.004 ; -8.326,-103.978 -7.945,-103.978 ; -8.326,-103.953 -7.971,-103.953 ; -8.326,-103.927 -7.971,-103.927 ; -8.326,-103.902 -7.996,-103.902 ; -8.326,-103.877 -7.996,-103.877 ; -8.326,-99.254 -2.51,-99.254 ; -8.326,-99.228 -2.459,-99.228 ; -8.326,-97.019 -4.212,-97.019 ; -8.326,-93.971 -5.837,-93.971 ; -8.326,-93.945 -5.964,-93.945 ; -8.301,-102.251 16.464,-102.251 ; -8.301,-99.203 -2.434,-99.203 ; -8.301,-99.178 -2.383,-99.178 ; -8.301,-99.152 -2.357,-99.152 ; -8.301,-97.069 -4.161,-97.069 ; -8.301,-97.044 -4.186,-97.044 ; -8.301,-93.92 -6.091,-93.92 ; -8.301,-93.894 -6.167,-93.894 ; -8.301,-91.862 -6.244,-91.862 ; -8.276,-102.226 16.464,-102.226 ; -8.276,-99.127 -2.332,-99.127 ; -8.276,-99.101 -2.281,-99.101 ; -8.276,-97.12 -4.085,-97.12 ; -8.276,-97.095 -4.135,-97.095 ; -8.276,-93.869 -6.218,-93.869 ; -8.276,-93.844 -6.244,-93.844 ; -8.276,-93.818 -6.269,-93.818 ; -8.25,-99.076 -2.256,-99.076 ; -8.25,-99.051 -2.23,-99.051 ; -8.25,-99.025 -2.205,-99.025 ; -8.25,-97.196 -3.983,-97.196 ; -8.25,-97.171 -4.034,-97.171 ; -8.25,-97.146 -4.059,-97.146 ; -8.25,-93.793 -6.32,-93.793 ; -8.25,-93.767 -6.396,-93.767 ; -8.25,-91.888 -6.269,-91.888 ; -8.225,-102.2 16.464,-102.2 ; -8.225,-99 -2.18,-99 ; -8.225,-98.974 -2.154,-98.974 ; -8.225,-98.949 -2.129,-98.949 ; -8.225,-97.273 -3.78,-97.273 ; -8.225,-97.247 -3.881,-97.247 ; -8.225,-97.222 -3.932,-97.222 ; -8.225,-93.742 -6.447,-93.742 ; -8.225,-93.717 -6.472,-93.717 ; -8.225,-93.691 -6.498,-93.691 ; -8.225,-91.913 -6.294,-91.913 ; -8.199,-102.175 16.464,-102.175 ; -8.199,-98.924 -2.103,-98.924 ; -8.199,-98.898 -2.078,-98.898 ; -8.199,-98.873 -2.078,-98.873 ; -8.199,-98.847 -2.053,-98.847 ; -8.199,-97.349 -3.653,-97.349 ; -8.199,-97.323 -3.704,-97.323 ; -8.199,-97.298 -3.754,-97.298 ; -8.199,-93.666 -6.523,-93.666 ; -8.199,-93.64 -6.548,-93.64 ; -8.199,-93.615 -6.574,-93.615 ; -8.199,-91.964 -6.371,-91.964 ; -8.199,-91.939 -6.32,-91.939 ; -8.174,-102.149 16.464,-102.149 ; -8.174,-98.822 -2.027,-98.822 ; -8.174,-98.797 -2.027,-98.797 ; -8.174,-98.771 -2.027,-98.771 ; -8.174,-98.746 -2.027,-98.746 ; -8.174,-98.72 -2.027,-98.72 ; -8.174,-97.425 -3.5,-97.425 ; -8.174,-97.4 -3.551,-97.4 ; -8.174,-97.374 -3.602,-97.374 ; -8.174,-93.59 -6.625,-93.59 ; -8.174,-93.564 -6.65,-93.564 ; -8.174,-93.539 -6.675,-93.539 ; -8.174,-93.513 -6.675,-93.513 ; -8.174,-92.015 -6.421,-92.015 ; -8.174,-91.989 -6.396,-91.989 ; -8.149,-98.695 -2.027,-98.695 ; -8.149,-98.67 -2.027,-98.67 ; -8.149,-98.644 -2.002,-98.644 ; -8.149,-98.619 -1.773,-98.619 ; -8.149,-98.593 -1.748,-98.593 ; -8.149,-98.568 -1.748,-98.568 ; -8.149,-98.543 -1.722,-98.543 ; -8.149,-97.781 -2.535,-97.781 ; -8.149,-97.755 -2.611,-97.755 ; -8.149,-97.73 -2.688,-97.73 ; -8.149,-97.704 -2.764,-97.704 ; -8.149,-97.679 -2.815,-97.679 ; -8.149,-97.476 -3.399,-97.476 ; -8.149,-97.45 -3.45,-97.45 ; -8.149,-93.488 -6.701,-93.488 ; -8.149,-93.463 -6.701,-93.463 ; -8.149,-93.437 -6.701,-93.437 ; -8.149,-92.091 -6.498,-92.091 ; -8.149,-92.066 -6.472,-92.066 ; -8.149,-92.04 -6.447,-92.04 ; -8.123,-102.124 16.464,-102.124 ; -8.123,-98.517 -1.722,-98.517 ; -8.123,-98.492 -1.722,-98.492 ; -8.123,-97.857 -2.383,-97.857 ; -8.123,-97.831 -2.383,-97.831 ; -8.123,-97.806 -2.408,-97.806 ; -8.123,-97.654 -2.891,-97.654 ; -8.123,-97.628 -2.942,-97.628 ; -8.123,-97.603 -3.018,-97.603 ; -8.123,-97.577 -3.094,-97.577 ; -8.123,-97.552 -3.17,-97.552 ; -8.123,-97.527 -3.246,-97.527 ; -8.123,-97.501 -3.323,-97.501 ; -8.123,-93.412 -6.701,-93.412 ; -8.123,-93.386 -6.701,-93.386 ; -8.123,-93.361 -6.701,-93.361 ; -8.123,-93.336 -6.701,-93.336 ; -8.123,-92.167 -6.574,-92.167 ; -8.123,-92.142 -6.548,-92.142 ; -8.123,-92.116 -6.523,-92.116 ; -8.098,-98.466 -1.722,-98.466 ; -8.098,-97.933 -2.434,-97.933 ; -8.098,-97.908 -2.434,-97.908 ; -8.098,-97.882 -2.408,-97.882 ; -8.098,-93.31 -6.701,-93.31 ; -8.098,-93.285 -6.726,-93.285 ; -8.098,-93.259 -6.726,-93.259 ; -8.098,-93.234 -6.726,-93.234 ; -8.098,-93.209 -6.726,-93.209 ; -8.098,-92.269 -6.625,-92.269 ; -8.098,-92.243 -6.625,-92.243 ; -8.098,-92.218 -6.599,-92.218 ; -8.098,-92.193 -6.574,-92.193 ; -8.072,-102.099 16.464,-102.099 ; -8.072,-98.289 -1.875,-98.289 ; -8.072,-98.263 -1.9,-98.263 ; -8.072,-98.238 -1.9,-98.238 ; -8.072,-98.212 -1.9,-98.212 ; -8.072,-98.187 -1.9,-98.187 ; -8.072,-98.162 -1.9,-98.162 ; -8.072,-98.136 -1.926,-98.136 ; -8.072,-98.111 -2.103,-98.111 ; -8.072,-98.085 -2.129,-98.085 ; -8.072,-98.06 -2.51,-98.06 ; -8.072,-98.035 -2.535,-98.035 ; -8.072,-98.009 -2.51,-98.009 ; -8.072,-97.984 -2.484,-97.984 ; -8.072,-97.958 -2.459,-97.958 ; -8.072,-93.183 -6.752,-93.183 ; -8.072,-93.158 -6.752,-93.158 ; -8.072,-93.132 -6.777,-93.132 ; -8.072,-93.107 -6.777,-93.107 ; -8.072,-92.396 -6.701,-92.396 ; -8.072,-92.37 -6.675,-92.37 ; -8.072,-92.345 -6.675,-92.345 ; -8.072,-92.32 -6.65,-92.32 ; -8.072,-92.294 -6.65,-92.294 ; -8.047,-98.441 -1.824,-98.441 ; -8.047,-98.416 -1.824,-98.416 ; -8.047,-98.39 -1.849,-98.39 ; -8.047,-98.365 -1.849,-98.365 ; -8.047,-98.339 -1.849,-98.339 ; -8.047,-98.314 -1.875,-98.314 ; -8.047,-93.082 -6.777,-93.082 ; -8.047,-93.056 -6.777,-93.056 ; -8.047,-93.031 -6.777,-93.031 ; -8.047,-93.005 -6.777,-93.005 ; -8.047,-92.98 -6.802,-92.98 ; -8.047,-92.955 -6.802,-92.955 ; -8.047,-92.929 -6.802,-92.929 ; -8.047,-92.904 -6.802,-92.904 ; -8.047,-92.878 -6.777,-92.878 ; -8.047,-92.853 -6.777,-92.853 ; -8.047,-92.828 -6.777,-92.828 ; -8.047,-92.802 -6.777,-92.802 ; -8.047,-92.777 -6.777,-92.777 ; -8.047,-92.751 -6.777,-92.751 ; -8.047,-92.726 -6.777,-92.726 ; -8.047,-92.574 -6.752,-92.574 ; -8.047,-92.548 -6.726,-92.548 ; -8.047,-92.523 -6.726,-92.523 ; -8.047,-92.497 -6.726,-92.497 ; -8.047,-92.472 -6.726,-92.472 ; -8.047,-92.447 -6.701,-92.447 ; -8.047,-92.421 -6.701,-92.421 ; -8.022,-102.073 16.464,-102.073 ; -8.022,-92.701 -6.777,-92.701 ; -8.022,-92.675 -6.777,-92.675 ; -8.022,-92.65 -6.752,-92.65 ; -8.022,-92.624 -6.752,-92.624 ; -8.022,-92.599 -6.752,-92.599 ; -7.945,-102.048 16.464,-102.048 ; -7.869,-102.022 16.464,-102.022 ; -7.818,-101.997 16.464,-101.997 ; -7.793,-101.972 16.464,-101.972 ; -7.742,-101.946 -6.853,-101.946 ; -7.666,-101.921 -6.853,-101.921 ; -7.488,-101.895 -6.879,-101.895 ; -7.437,-105.553 -6.548,-105.553 ; -7.437,-105.528 -6.548,-105.528 ; -7.437,-100.778 -7.361,-100.778 ; -7.437,-100.752 -7.234,-100.752 ; -7.437,-100.6 -7.361,-100.6 ; -7.437,-100.575 -7.209,-100.575 ; -7.437,-100.549 -7.183,-100.549 ; -7.437,-100.524 -7.183,-100.524 ; -7.412,-105.502 -6.548,-105.502 ; -7.412,-105.477 -6.548,-105.477 ; -7.412,-100.879 -7.361,-100.879 ; -7.412,-100.854 -7.361,-100.854 ; -7.412,-100.829 -7.387,-100.829 ; -7.412,-100.803 -7.387,-100.803 ; -7.412,-100.727 -7.234,-100.727 ; -7.412,-100.498 -7.183,-100.498 ; -7.412,-100.473 -7.183,-100.473 ; -7.387,-105.451 -6.548,-105.451 ; -7.387,-105.426 -6.548,-105.426 ; -7.387,-103.673 -6.472,-103.673 ; -7.387,-103.648 -6.472,-103.648 ; -7.387,-103.623 -6.472,-103.623 ; -7.387,-103.597 -6.472,-103.597 ; -7.387,-103.572 -6.472,-103.572 ; -7.387,-103.546 -6.472,-103.546 ; -7.387,-103.521 -6.472,-103.521 ; -7.387,-100.702 -7.234,-100.702 ; -7.387,-100.676 -7.234,-100.676 ; -7.387,-100.448 -7.183,-100.448 ; -7.361,-105.401 -6.548,-105.401 ; -7.361,-103.724 -6.498,-103.724 ; -7.361,-103.699 -6.498,-103.699 ; -7.361,-103.496 -6.472,-103.496 ; -7.361,-103.47 -6.472,-103.47 ; -7.361,-103.445 -6.472,-103.445 ; -7.361,-100.651 -7.209,-100.651 ; -7.361,-100.422 -7.209,-100.422 ; -7.361,-100.397 -7.209,-100.397 ; -7.336,-105.375 -6.548,-105.375 ; -7.336,-105.35 -6.548,-105.35 ; -7.336,-103.775 -6.498,-103.775 ; -7.336,-103.75 -6.498,-103.75 ; -7.336,-103.419 -6.472,-103.419 ; -7.336,-100.625 -7.209,-100.625 ; -7.336,-100.371 -7.234,-100.371 ; -7.31,-105.324 -6.548,-105.324 ; -7.31,-105.299 -6.548,-105.299 ; -7.31,-103.8 -6.498,-103.8 ; -7.31,-103.394 -6.472,-103.394 ; -7.31,-100.93 -7.285,-100.93 ; -7.31,-100.905 -7.26,-100.905 ; -7.31,-100.879 -7.26,-100.879 ; -7.31,-100.854 -7.26,-100.854 ; -7.31,-100.829 -7.26,-100.829 ; -7.31,-100.6 -7.209,-100.6 ; -7.31,-100.346 -7.26,-100.346 ; -7.285,-105.274 -6.548,-105.274 ; -7.285,-105.248 -6.548,-105.248 ; -7.285,-103.826 -6.498,-103.826 ; -7.285,-103.369 -6.472,-103.369 ; -7.285,-101.87 -6.879,-101.87 ; -7.285,-100.803 -7.26,-100.803 ; -7.285,-100.778 -7.234,-100.778 ; -7.26,-105.223 -6.548,-105.223 ; -7.26,-103.343 -6.472,-103.343 ; -7.234,-105.197 -6.548,-105.197 ; -7.234,-105.172 -6.548,-105.172 ; -7.234,-103.851 -6.498,-103.851 ; -7.209,-105.147 -6.548,-105.147 ; -7.209,-105.121 -6.523,-105.121 ; -7.209,-103.318 -6.472,-103.318 ; -7.183,-105.096 -6.523,-105.096 ; -7.183,-105.07 -6.523,-105.07 ; -7.183,-103.877 -6.498,-103.877 ; -7.158,-105.045 -6.523,-105.045 ; -7.158,-103.292 -6.472,-103.292 ; -7.158,-101.845 -6.879,-101.845 ; -7.158,-100.854 -7.082,-100.854 ; -7.158,-100.829 -7.082,-100.829 ; -7.158,-100.803 -7.082,-100.803 ; -7.158,-100.778 -7.082,-100.778 ; -7.158,-100.752 -7.082,-100.752 ; -7.133,-105.02 -6.523,-105.02 ; -7.133,-104.994 -6.523,-104.994 ; -7.133,-100.905 -7.107,-100.905 ; -7.133,-100.879 -7.082,-100.879 ; -7.133,-100.727 -7.082,-100.727 ; -7.133,-100.702 -7.082,-100.702 ; -7.133,-100.676 -7.082,-100.676 ; -7.107,-104.969 -6.523,-104.969 ; -7.107,-104.943 -6.523,-104.943 ; -7.107,-100.651 -7.056,-100.651 ; -7.107,-100.625 -7.056,-100.625 ; -7.107,-100.6 -7.056,-100.6 ; -7.107,-100.575 -7.056,-100.575 ; -7.082,-104.918 -6.523,-104.918 ; -7.082,-104.893 -6.523,-104.893 ; -7.056,-104.867 -6.523,-104.867 ; -7.056,-104.842 -6.523,-104.842 ; -7.056,-103.902 -6.498,-103.902 ; -7.031,-104.816 -6.523,-104.816 ; -7.031,-101.819 -6.904,-101.819 ; -7.006,-104.791 -6.523,-104.791 ; -7.006,-104.766 -6.523,-104.766 ; -6.98,-104.74 -6.523,-104.74 ; -6.98,-104.715 -6.523,-104.715 ; -6.98,-102.734 16.464,-102.734 ; -6.955,-104.689 -6.523,-104.689 ; -6.955,-104.664 -6.523,-104.664 ; -6.929,-104.639 -6.523,-104.639 ; -6.904,-104.613 -6.523,-104.613 ; -6.904,-104.588 -6.523,-104.588 ; -6.879,-104.562 -6.523,-104.562 ; -6.879,-104.537 -6.523,-104.537 ; -6.853,-104.512 -6.523,-104.512 ; -6.853,-104.486 -6.523,-104.486 ; -6.853,-99.965 -6.345,-99.965 ; -6.853,-99.94 -6.345,-99.94 ; -6.828,-104.461 -6.599,-104.461 ; -6.828,-101.946 16.464,-101.946 ; -6.828,-99.99 -6.345,-99.99 ; -6.828,-99.914 -6.345,-99.914 ; -6.802,-101.819 -6.777,-101.819 ; -6.802,-101.794 -6.777,-101.794 ; -6.802,-101.768 -6.777,-101.768 ; -6.802,-100.016 -6.345,-100.016 ; -6.777,-101.921 16.464,-101.921 ; -6.777,-100.321 -6.701,-100.321 ; -6.777,-100.295 -6.701,-100.295 ; -6.777,-100.27 -6.675,-100.27 ; -6.777,-100.244 -6.65,-100.244 ; -6.777,-100.219 -6.396,-100.219 ; -6.777,-100.092 -6.371,-100.092 ; -6.777,-100.067 -6.371,-100.067 ; -6.777,-100.041 -6.371,-100.041 ; -6.752,-101.895 16.464,-101.895 ; -6.752,-100.473 -6.726,-100.473 ; -6.752,-100.448 -6.726,-100.448 ; -6.752,-100.422 -6.726,-100.422 ; -6.752,-100.397 -6.726,-100.397 ; -6.752,-100.371 -6.726,-100.371 ; -6.752,-100.346 -6.726,-100.346 ; -6.752,-100.194 -6.396,-100.194 ; -6.752,-100.168 -6.396,-100.168 ; -6.752,-100.143 -6.396,-100.143 ; -6.752,-100.117 -6.371,-100.117 ; -6.726,-101.87 16.464,-101.87 ; -6.726,-101.845 16.464,-101.845 ; -6.726,-99.889 -6.294,-99.889 ; -6.701,-101.819 16.464,-101.819 ; -6.701,-99.863 -6.269,-99.863 ; -6.675,-101.794 16.464,-101.794 ; -6.675,-101.768 16.464,-101.768 ; -6.675,-99.838 -6.269,-99.838 ; -6.675,-99.813 -6.244,-99.813 ; -6.65,-101.743 16.464,-101.743 ; -6.65,-99.787 -6.244,-99.787 ; -6.65,-99.762 -6.244,-99.762 ; -6.65,-99.736 -6.244,-99.736 ; -6.625,-103.927 -6.498,-103.927 ; -6.625,-100.371 -6.599,-100.371 ; -6.625,-100.244 -6.396,-100.244 ; -6.599,-101.718 -5.837,-101.718 ; -6.599,-100.27 -6.371,-100.27 ; -6.574,-100.295 -6.371,-100.295 ; -6.548,-100.702 -6.498,-100.702 ; -6.548,-100.676 -6.498,-100.676 ; -6.548,-100.651 -6.472,-100.651 ; -6.548,-100.625 -6.472,-100.625 ; -6.548,-100.6 -6.447,-100.6 ; -6.548,-100.575 -6.447,-100.575 ; -6.548,-100.549 -6.447,-100.549 ; -6.548,-100.524 -6.421,-100.524 ; -6.548,-100.498 -6.421,-100.498 ; -6.548,-100.473 -6.421,-100.473 ; -6.548,-100.448 -6.396,-100.448 ; -6.548,-100.422 -6.396,-100.422 ; -6.548,-100.321 -6.371,-100.321 ; -6.523,-100.397 -6.371,-100.397 ; -6.523,-100.371 -6.371,-100.371 ; -6.523,-100.346 -6.371,-100.346 ; -6.294,-101.692 -5.837,-101.692 ; -6.269,-101.667 -5.812,-101.667 ; -6.244,-101.641 -5.812,-101.641 ; -6.218,-102.759 16.464,-102.759 ; -6.218,-101.616 -5.659,-101.616 ; -6.218,-99.813 -6.04,-99.813 ; -6.218,-99.787 -6.015,-99.787 ; -6.193,-99.863 -6.066,-99.863 ; -6.193,-99.838 -6.04,-99.838 ; -6.193,-99.762 -5.99,-99.762 ; -6.193,-99.736 -3.475,-99.736 ; -6.193,-99.711 -3.45,-99.711 ; -6.193,-99.686 -3.196,-99.686 ; -6.193,-99.66 -3.17,-99.66 ; -6.193,-99.635 -3.119,-99.635 ; -6.117,-100.448 -4.999,-100.448 ; -6.117,-100.422 -4.974,-100.422 ; -6.091,-101.591 -5.659,-101.591 ; -6.091,-100.498 -5.126,-100.498 ; -6.091,-100.473 -5.05,-100.473 ; -6.091,-100.397 -4.948,-100.397 ; -6.066,-101.565 -5.685,-101.565 ; -6.066,-100.524 -5.329,-100.524 ; -6.066,-100.371 -4.821,-100.371 ; -6.04,-100.549 -5.405,-100.549 ; -6.04,-100.346 -4.796,-100.346 ; -6.04,-100.321 -4.77,-100.321 ; -6.04,-100.295 -4.77,-100.295 ; -6.04,-100.067 -3.907,-100.067 ; -6.04,-100.041 -3.907,-100.041 ; -6.04,-100.016 -3.907,-100.016 ; -6.015,-101.54 -5.685,-101.54 ; -6.015,-100.27 -4.897,-100.27 ; -6.015,-100.244 -4.872,-100.244 ; -6.015,-100.219 -4.847,-100.219 ; -6.015,-100.194 -4.796,-100.194 ; -6.015,-100.168 -4.77,-100.168 ; -6.015,-100.143 -4.72,-100.143 ; -6.015,-100.117 -4.694,-100.117 ; -6.015,-100.092 -4.643,-100.092 ; -6.015,-99.99 -3.881,-99.99 ; -6.015,-99.965 -3.856,-99.965 ; -5.99,-100.575 -5.507,-100.575 ; -5.99,-99.94 -3.805,-99.94 ; -5.99,-99.914 -3.78,-99.914 ; -5.964,-100.651 -5.507,-100.651 ; -5.964,-100.625 -5.507,-100.625 ; -5.964,-100.6 -5.507,-100.6 ; -5.964,-99.889 -3.729,-99.889 ; -5.964,-99.863 -3.704,-99.863 ; -5.964,-99.838 -3.653,-99.838 ; -5.964,-99.813 -3.602,-99.813 ; -5.964,-99.787 -3.577,-99.787 ; -5.964,-99.762 -3.526,-99.762 ; -5.939,-100.727 -5.634,-100.727 ; -5.939,-100.702 -5.583,-100.702 ; -5.939,-100.676 -5.532,-100.676 ; -5.913,-105.604 -5.685,-105.604 ; -5.913,-105.578 -5.659,-105.578 ; -5.913,-105.553 -5.634,-105.553 ; -5.913,-105.528 -5.609,-105.528 ; -5.913,-105.502 -5.583,-105.502 ; -5.913,-105.477 -5.558,-105.477 ; -5.913,-105.451 -5.532,-105.451 ; -5.913,-105.426 -5.507,-105.426 ; -5.913,-105.401 -5.482,-105.401 ; -5.913,-105.375 -5.456,-105.375 ; -5.913,-105.35 -5.431,-105.35 ; -5.913,-105.324 -5.405,-105.324 ; -5.913,-105.299 -5.38,-105.299 ; -5.913,-105.274 -5.355,-105.274 ; -5.913,-105.248 -5.329,-105.248 ; -5.913,-105.223 -5.304,-105.223 ; -5.913,-105.197 -5.278,-105.197 ; -5.913,-105.172 -5.253,-105.172 ; -5.913,-105.147 -5.228,-105.147 ; -5.913,-105.121 -5.202,-105.121 ; -5.913,-105.096 -5.177,-105.096 ; -5.913,-105.07 -5.151,-105.07 ; -5.913,-105.045 -5.126,-105.045 ; -5.913,-105.02 -5.101,-105.02 ; -5.913,-104.994 -5.075,-104.994 ; -5.913,-101.514 -5.659,-101.514 ; -5.888,-104.969 -5.05,-104.969 ; -5.888,-104.943 -5.05,-104.943 ; -5.888,-104.918 -5.024,-104.918 ; -5.888,-104.893 -4.999,-104.893 ; -5.888,-104.867 -4.974,-104.867 ; -5.888,-104.842 -4.948,-104.842 ; -5.888,-104.816 -4.923,-104.816 ; -5.888,-104.791 -4.897,-104.791 ; -5.888,-104.766 -4.872,-104.766 ; -5.888,-104.74 -4.847,-104.74 ; -5.888,-104.715 -4.821,-104.715 ; -5.888,-104.689 -4.796,-104.689 ; -5.888,-104.664 -4.77,-104.664 ; -5.888,-104.639 -4.745,-104.639 ; -5.888,-104.613 -4.72,-104.613 ; -5.888,-104.588 -4.694,-104.588 ; -5.888,-104.562 -4.669,-104.562 ; -5.888,-104.537 -4.643,-104.537 ; -5.888,-104.512 -4.618,-104.512 ; -5.888,-104.486 -4.593,-104.486 ; -5.888,-104.461 -4.567,-104.461 ; -5.888,-104.435 -4.542,-104.435 ; -5.888,-104.41 -4.516,-104.41 ; -5.888,-104.385 -4.491,-104.385 ; -5.888,-104.359 -4.466,-104.359 ; -5.888,-104.334 -4.44,-104.334 ; -5.888,-104.308 -4.415,-104.308 ; -5.888,-104.283 -4.389,-104.283 ; -5.888,-104.258 -4.364,-104.258 ; -5.888,-100.752 -5.685,-100.752 ; -5.863,-104.232 -4.339,-104.232 ; -5.863,-104.207 -4.313,-104.207 ; -5.863,-104.181 -4.288,-104.181 ; -5.863,-104.156 -4.288,-104.156 ; -5.863,-104.131 -4.288,-104.131 ; -5.863,-104.105 -4.313,-104.105 ; -5.863,-104.08 -4.339,-104.08 ; -5.863,-104.054 -4.364,-104.054 ; -5.863,-104.029 -4.389,-104.029 ; -5.863,-104.004 -4.415,-104.004 ; -5.863,-103.978 -4.44,-103.978 ; -5.863,-103.953 -4.466,-103.953 ; -5.863,-103.927 -4.466,-103.927 ; -5.863,-103.902 -4.491,-103.902 ; -5.863,-103.877 -4.516,-103.877 ; -5.863,-103.851 -4.542,-103.851 ; -5.863,-103.826 -4.567,-103.826 ; -5.863,-103.8 -4.593,-103.8 ; -5.863,-103.775 -4.618,-103.775 ; -5.863,-103.75 -4.643,-103.75 ; -5.863,-103.724 -4.669,-103.724 ; -5.863,-103.699 -4.669,-103.699 ; -5.863,-103.673 -4.694,-103.673 ; -5.863,-103.648 -4.72,-103.648 ; -5.863,-103.623 -4.745,-103.623 ; -5.863,-103.597 -4.77,-103.597 ; -5.863,-103.572 -4.796,-103.572 ; -5.863,-103.546 -4.821,-103.546 ; -5.863,-100.778 -5.736,-100.778 ; -5.837,-103.521 -4.847,-103.521 ; -5.837,-103.496 -4.872,-103.496 ; -5.837,-103.47 -4.872,-103.47 ; -5.837,-103.445 -4.897,-103.445 ; -5.837,-103.419 -4.923,-103.419 ; -5.837,-103.394 -4.948,-103.394 ; -5.837,-103.369 -4.974,-103.369 ; -5.837,-103.343 -4.999,-103.343 ; -5.837,-103.318 -5.024,-103.318 ; -5.837,-103.292 -5.05,-103.292 ; -5.837,-103.267 -5.075,-103.267 ; -5.837,-103.242 -5.101,-103.242 ; -5.837,-103.216 -5.101,-103.216 ; -5.837,-103.191 -5.126,-103.191 ; -5.837,-103.165 -5.151,-103.165 ; -5.837,-103.14 -5.177,-103.14 ; -5.837,-103.115 -5.202,-103.115 ; -5.837,-103.089 -5.228,-103.089 ; -5.837,-103.064 -5.253,-103.064 ; -5.837,-103.038 -5.278,-103.038 ; -5.837,-103.013 -5.304,-103.013 ; -5.837,-102.988 -5.304,-102.988 ; -5.837,-102.962 -5.329,-102.962 ; -5.837,-102.937 -5.355,-102.937 ; -5.837,-102.911 -5.38,-102.911 ; -5.837,-102.886 -5.405,-102.886 ; -5.837,-102.861 -5.431,-102.861 ; -5.837,-102.835 -5.456,-102.835 ; -5.837,-102.81 -5.482,-102.81 ; -5.837,-101.489 -5.634,-101.489 ; -5.837,-100.803 -5.761,-100.803 ; -5.812,-102.784 16.464,-102.784 ; -5.761,-101.464 -5.558,-101.464 ; -5.736,-101.641 -5.685,-101.641 ; -5.685,-101.718 16.464,-101.718 ; -5.685,-101.438 -5.507,-101.438 ; -5.659,-101.692 16.464,-101.692 ; -5.634,-101.667 16.464,-101.667 ; -5.634,-101.641 16.464,-101.641 ; -5.634,-101.413 -5.431,-101.413 ; -5.609,-101.616 16.464,-101.616 ; -5.609,-101.591 -5.405,-101.591 ; -5.583,-101.565 -5.405,-101.565 ; -5.558,-101.54 -5.431,-101.54 ; -5.558,-101.387 -5.329,-101.387 ; -5.507,-101.514 -5.431,-101.514 ; -5.482,-101.362 -5.228,-101.362 ; -5.431,-101.337 -5.126,-101.337 ; -5.38,-101.591 16.464,-101.591 ; -5.38,-101.311 -4.897,-101.311 ; -5.355,-101.565 16.464,-101.565 ; -5.329,-101.286 -4.821,-101.286 ; -5.304,-101.54 16.464,-101.54 ; -5.253,-101.26 -4.72,-101.26 ; -5.253,-95.037 -5.228,-95.037 ; -5.253,-95.012 -5.177,-95.012 ; -5.253,-94.987 -5.126,-94.987 ; -5.228,-94.961 -5.126,-94.961 ; -5.228,-94.936 -5.126,-94.936 ; -5.228,-94.91 -5.126,-94.91 ; -5.228,-94.885 -5.126,-94.885 ; -5.202,-101.235 -4.669,-101.235 ; -5.126,-101.21 -4.669,-101.21 ; -5.05,-101.438 9.073,-101.438 ; -5.05,-101.413 -4.897,-101.413 ; -5.024,-101.464 9.174,-101.464 ; -5.024,-101.184 -4.669,-101.184 ; -4.999,-101.514 9.352,-101.514 ; -4.999,-101.489 9.25,-101.489 ; -4.999,-101.387 -4.948,-101.387 ; -4.974,-93.996 -4.44,-93.996 ; -4.923,-101.159 -4.669,-101.159 ; -4.923,-100.397 -4.872,-100.397 ; -4.821,-105.655 -3.653,-105.655 ; -4.821,-101.133 -4.643,-101.133 ; -4.796,-105.629 -3.653,-105.629 ; -4.796,-101.108 -4.618,-101.108 ; -4.77,-105.604 -3.653,-105.604 ; -4.77,-102.81 16.464,-102.81 ; -4.745,-105.578 -3.653,-105.578 ; -4.745,-101.413 8.996,-101.413 ; -4.745,-101.083 -4.593,-101.083 ; -4.745,-93.971 -4.44,-93.971 ; -4.72,-105.553 -3.653,-105.553 ; -4.72,-101.387 8.92,-101.387 ; -4.72,-96.663 -4.669,-96.663 ; -4.694,-105.528 -3.653,-105.528 ; -4.669,-105.502 -3.653,-105.502 ; -4.669,-101.057 -4.567,-101.057 ; -4.643,-105.477 -3.653,-105.477 ; -4.643,-105.451 -3.653,-105.451 ; -4.643,-102.861 -3.577,-102.861 ; -4.643,-102.835 16.464,-102.835 ; -4.643,-101.362 8.869,-101.362 ; -4.618,-105.426 -3.653,-105.426